# EAGLE board UA18_Dash_backup (EAGLE 8.2.0)
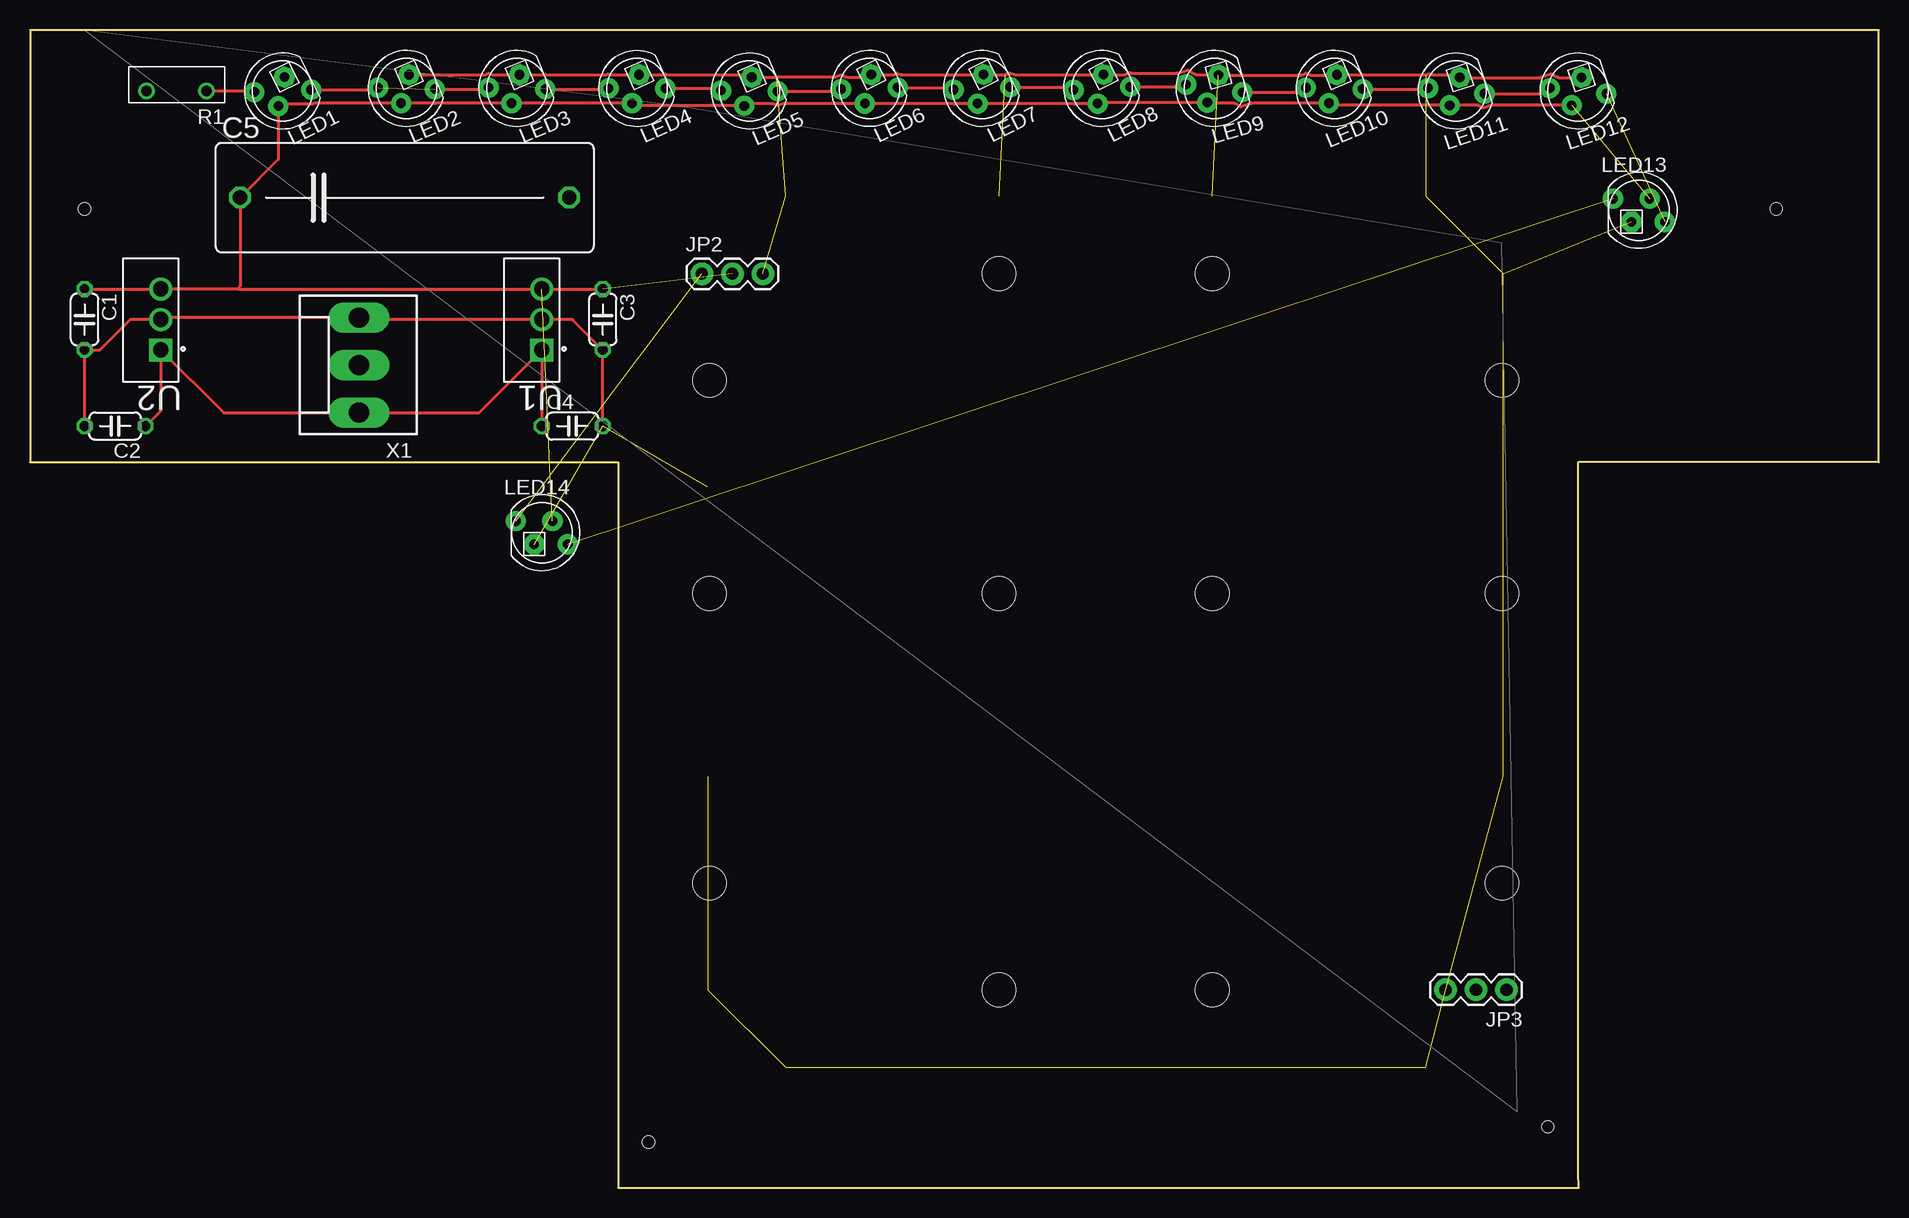
[diagram p0: board, top side]
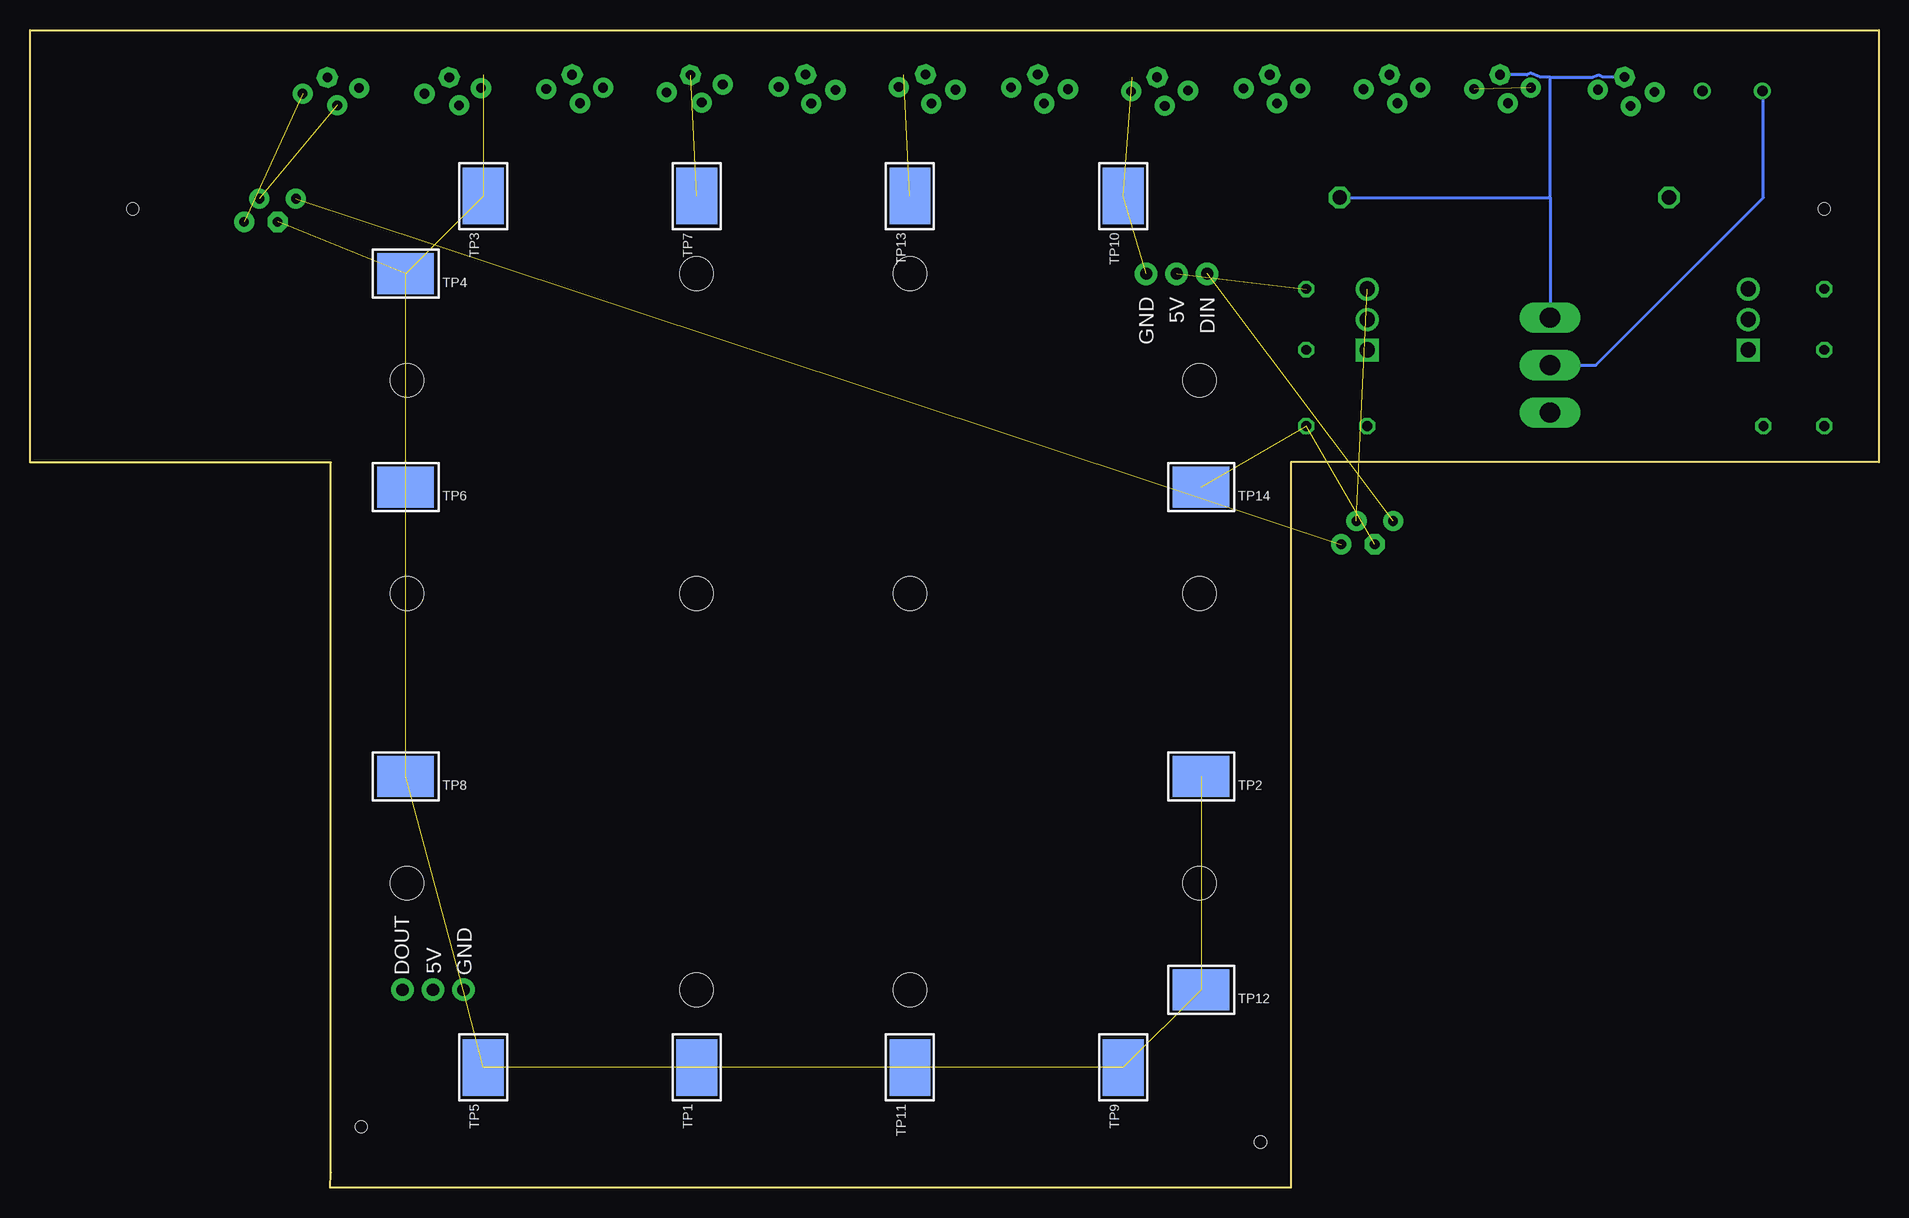
[diagram p1: board, bottom side, seen from below]

Size 154.08 x 96.52 mm. Coordinates in mm from the lower left corner, seen from the top.
Outline: 0,96.52 0,60.49 49,60.49 49,0 129.08,0 129.01,1.27 129.01,60.49 154.08,60.49 154.08,96.52 0,96.52
Copper layers (1*16): Top 0.035mm / dielectric 1.5mm / Bottom 0.035mm
Design rules "default": minimum track width 6mil, minimum drill 0.35mm, track to track 6mil, track to pad 6mil, pad to pad 6mil, via to via 6mil, smd to smd 6mil, copper to edge 40mil, drill to drill 6mil, minimum pad ring 10mil, minimum via ring 8mil, stop-mask expansion 4mil, vias tented up to drill 0mil, thermal gap 10mil
Holes 1 mm at 4.55,81.61 145.52,81.61 51.54,3.81 126.47,5.08
Holes 2.8 mm at 56.62,67.31 56.62,49.53 56.62,25.4 122.66,25.4 122.66,49.53 122.66,67.31 80.75,76.2 98.53,76.2 80.75,49.53 98.53,49.53 80.75,16.51 98.53,16.51

## Footprints (pad centres in the part's own frame; a part is rotated, then mirrored left to right if it is on the bottom)
C050-024X044 = drill 0.813 octagon: 1 -2.54,0; 2 2.54,0
C275-093X316 = drill 1.194 octagon: 1 -13.716,0; 2 13.716,0
1X03 = drill 1.016 pad 1.88: 1 0,0; 2 2.54,0; 3 5.08,0
LED5MMRGB = drill 0.8 pad 1.676: 1 -2.159,0.968; 3 0.889,0.968; 4 2.159,-0.968 | drill 0.8 pad 1.676 octagon: 2 -0.635,-0.968
TO-126 = drill 0.9: P$1 0,0; P$2 5,0
TESTPOINT_SMT = smd 4.7 x 3.4: P$1 0,0
TO254P460X1020X1945-3P = drill 1.27 pad 1.91 square: 1 0,2.54 | drill 1.27 pad 1.91: 2 0,0; 3 0,-2.54
KK-156-3 = drill 1.7 pad 2.184 long: 1 -3.96,0; 2 0,0; 3 3.96,0

## Placement (x,y rotation side)
C1  0.1uF  [C050-024X044]  4.55,72.39 270 top
C2  0.33uF  [C050-024X044]  7.09,63.5 180 top
C3  0.1uF  [C050-024X044]  47.73,72.39 270 top
C4  0.33uF  [C050-024X044]  45.19,63.5 0 top
C5  [C275-093X316]  31.22,82.55 0 top
JP2  [1X03]  55.98,76.2 0 top
JP3  [1X03]  123.04,16.51 180 top
LED1  RGBLED_CA-5MM  [LED5MMRGB]  21.06,91.44 206.5 top
LED2  RGBLED_CA-5MM  [LED5MMRGB]  31.37,91.65 202.7 top
LED3  RGBLED_CA-5MM  [LED5MMRGB]  40.58,91.65 202.5 top
LED4  RGBLED_CA-5MM  [LED5MMRGB]  50.58,91.65 204.1 top
LED5  RGBLED_CA-5MM  [LED5MMRGB]  59.95,91.44 203.4 top
LED6  RGBLED_CA-5MM  [LED5MMRGB]  69.95,91.65 205.8 top
LED7  RGBLED_CA-5MM  [LED5MMRGB]  79.32,91.65 206.9 top
LED8  RGBLED_CA-5MM  [LED5MMRGB]  89.32,91.65 207.2 top
LED9  RGBLED_CA-5MM  [LED5MMRGB]  98.69,91.65 196.1 top
LED10  RGBLED_CA-5MM  [LED5MMRGB]  108.69,91.65 202.7 top
LED11  RGBLED_CA-5MM  [LED5MMRGB]  118.85,91.44 198.5 top
LED12  RGBLED_CA-5MM  [LED5MMRGB]  129.01,91.44 198.5 top
LED13  RGBLED_CA-5MM  [LED5MMRGB]  134.08,81.49 0 top
LED14  RGBLED_CA-5MM  [LED5MMRGB]  42.65,54.61 0 top
R1  400 ohm  [TO-126]  14.71,91.44 180 top
TP1  [TESTPOINT_SMT]  98.53,10.03 270 bottom
TP2  [TESTPOINT_SMT]  56.49,34.29 0 bottom
TP3  [TESTPOINT_SMT]  116.31,82.68 270 bottom
TP4  [TESTPOINT_SMT]  122.79,76.2 0 bottom
TP5  [TESTPOINT_SMT]  116.31,10.03 270 bottom
TP6  [TESTPOINT_SMT]  122.79,58.42 0 bottom
TP7  [TESTPOINT_SMT]  98.53,82.68 270 bottom
TP8  [TESTPOINT_SMT]  122.79,34.29 0 bottom
TP9  [TESTPOINT_SMT]  62.97,10.03 270 bottom
TP10  [TESTPOINT_SMT]  62.97,82.68 270 bottom
TP11  [TESTPOINT_SMT]  80.75,10.03 270 bottom
TP12  [TESTPOINT_SMT]  56.49,16.51 0 bottom
TP13  [TESTPOINT_SMT]  80.75,82.68 270 bottom
TP14  [TESTPOINT_SMT]  56.49,58.42 0 bottom
U1  L7805ABV  [TO254P460X1020X1945-3P]  42.65,72.39 180 top
U2  L7805ABV  [TO254P460X1020X1945-3P]  10.9,72.39 180 top
X1  [KK-156-3]  27.41,68.58 90 top

## Library data of the parts
C1-C5 LED1-LED14 = adafruit
JP2 JP3 = neomatrix-8x8
R1 = FSAE_FRED
TP1-TP14 = microbuilder
U1 U2 = L7805ABV; AVAILABILITY: Good; DESCRIPTION: IC REG LINEAR 5V 1.5A TO220AB; MF: STMicroelectronics; MP: L7805ABV; PACKAGE: TO-220 STMicroelectronics; PRICE: 0.27 USD
X1 = con-molex; MF: MOLEX; OC_FARNELL: unknown; OC_NEWARK: unknown

## Nets
5V: C1.1 C3.1 C5.1 JP2.2 LED1.3 LED2.3 LED3.3 LED4.3 LED5.3 LED6.3 LED7.3 LED8.3 LED9.3 LED10.3 LED11.3 LED12.3 LED13.3 LED14.3 U1.3 U2.3
12V: C2.1 C4.1 U1.1 U2.1 X1.1
D_IN: R1.P$2 X1.2
D_MAT: JP2.1 LED14.1
DI_L12: LED1.4 R1.P$1
DO_L1: LED7.1 LED8.4
DO_L2: LED13.1 LED14.4
DO_L3: LED12.1 LED13.4
DO_L4: LED11.1 LED12.4
DO_L5: LED10.1 LED11.4
DO_L6: LED9.1 LED10.4
DO_L7: LED8.1 LED9.4
DO_L8: LED6.1 LED7.4
DO_L9: LED5.1 LED6.4
DO_L10: LED4.1 LED5.4
DO_L11: LED3.1 LED4.4
DO_L12: LED1.1 LED2.1 LED2.4 LED3.4
GND: C1.2 C2.2 C3.2 C4.2 C5.2 JP2.3 JP3.3 LED1.2 LED2.2 LED3.2 LED4.2 LED5.2 LED6.2 LED7.2 LED8.2 LED9.2 LED10.2 LED11.2 LED12.2 LED13.2 LED14.2 TP1.P$1 TP2.P$1 TP3.P$1 TP4.P$1 TP5.P$1 TP6.P$1 TP7.P$1 TP8.P$1 TP9.P$1 TP10.P$1 TP11.P$1 TP12.P$1 TP13.P$1 TP14.P$1 U1.2 U2.2 X1.3

## Tracks (layer width: path | path; a pad name or v marks a point on that pad's centre or on a via)
5V  (3 unrouted)
  Top 0.254: LED12.3 121.84,90.24 121.12,90 120.64,90.24 LED11.3 108.42,90.24 LED10.3 101.81,90.41 101.79,90.37 100.9,90.12 100.36,90.41 98.16,90.41 LED9.3 89.06,90.47 LED8.3 87.18,90.38 87.06,90.32 86.86,90.38 LED7.3 77.16,90.38 77.05,90.33 76.89,90.38 LED6.3 67.69,90.39 67.65,90.38 67.61,90.39 62.78,90.39 62.34,90.2 61.85,90.39 59.71,90.39 LED5.3 50.37,90.2 LED4.3 43.02,90.4 42.95,90.37 42.87,90.4 40.14,90.4 LED3.3 33.82,90.42 33.74,90.38 33.65,90.42 LED2.3 23.68,90.41 23.51,90.33 20.85,90.33 LED1.3 20.7,85.74 C5.1 17.5,75.18 17.25,74.93 | C1.1 U2.3 17.25,74.93 | C3.1 U1.3 17.25,74.93
12V
  Top 0.254: C4.1 U1.1 37.42,64.62 X1.1 16.13,64.62 U2.1 10.9,64.77 C2.1
D_IN
  Bottom 0.254: X1.2 23.6,68.58 9.63,82.55 9.63,91.36 R1.P$2
D_MAT  (1 unrouted)
DI_L12
  Top 0.254: R1.P$1 18.6,91.44 LED1.4
DO_L1
  Top 0.254: LED7.1 86.72,91.76 LED8.4
DO_L2  (1 unrouted)
DO_L3  (1 unrouted)
DO_L4
  Top 0.254: LED11.1 126.19,91.21 LED12.4
DO_L5
  Top 0.254: LED10.1 116.41,91.59 LED11.4
DO_L6
  Top 0.254: LED9.1 105.93,91.32 LED10.4
DO_L7
  Top 0.254: LED8.1 96.14,91.78 LED9.4
DO_L8
  Top 0.254: LED6.1 76.78,91.72 LED7.4
DO_L9
  Top 0.254: LED5.1 67.41,91.41 LED6.4
DO_L10
  Top 0.254: LED4.1 57.41,91.65 LED5.4
DO_L11
  Top 0.254: LED3.1 48.14,91.58 LED4.4
DO_L12  (1 unrouted)
  Top 0.254: LED1.1 28.83,91.54 LED2.4 | LED2.1 38.09,91.59 LED3.4
GND  (18 unrouted)
  Top 0.254: LED2.2 33.7,92.79 33.73,92.8 33.76,92.79 37.88,92.79 38.22,92.93 38.55,92.79 LED3.2 42.94,92.79 42.95,92.79 48.02,92.79 48.18,92.86 48.36,92.79 LED4.2 52.77,92.79 52.91,92.86 53.08,92.79 59.94,92.79 LED5.2 62.21,92.58 62.3,92.62 67.16,92.62 67.52,92.79 68.11,92.58 69.88,92.58 LED6.2 71.98,92.8 72.25,92.92 72.61,92.8 LED7.2 81.26,92.8 81.59,92.97 82.1,92.8 LED8.2 91.23,92.8 91.58,92.98 91.75,92.93 95.59,92.93 96.48,93.18 97.17,92.8 98.99,92.8 LED9.2 105.93,92.76 106.32,92.92 106.72,92.76 108.87,92.76 LED10.2 111.03,92.79 111.05,92.8 111.08,92.79 116.31,92.79 116.58,92.88 116.76,92.79 118.92,92.79 LED11.2 125.85,92.56 125.86,92.59 126.74,92.88 127.38,92.56 LED12.2 | C4.2 C3.2 45.19,72.39 U1.2 | C2.2 C1.2 5.82,69.85 8.36,72.39 U2.2 | U2.2 11.05,72.24 | U1.2 42.5,72.24 | U1.2 27.56,72.39 X1.3 11.05,72.54 U2.2
  Bottom 0.254: LED1.2 23.03,92.59 23.34,92.74 23.8,92.59 27.41,92.59 | 27.41,92.59 28.21,92.59 29,92.92 29.32,92.79 LED2.2 | 27.41,82.55 X1.3 | 27.41,82.55 27.41,92.59 | C5.2 27.41,82.55

## Text on the board
bPlace: DIN | 5V | GND | GND | 5V | DOUT